# Altium PCB PCB1.PcbDoc
Units mil, origin at the board's own origin, x right, y up, seen from the top; angles counter-clockwise.
Board outline 3238.19 x 3671.26 mil, 2 copper layers (Top Layer, Bottom Layer); 43 components, 31 nets, 181 pads, 0 vias.
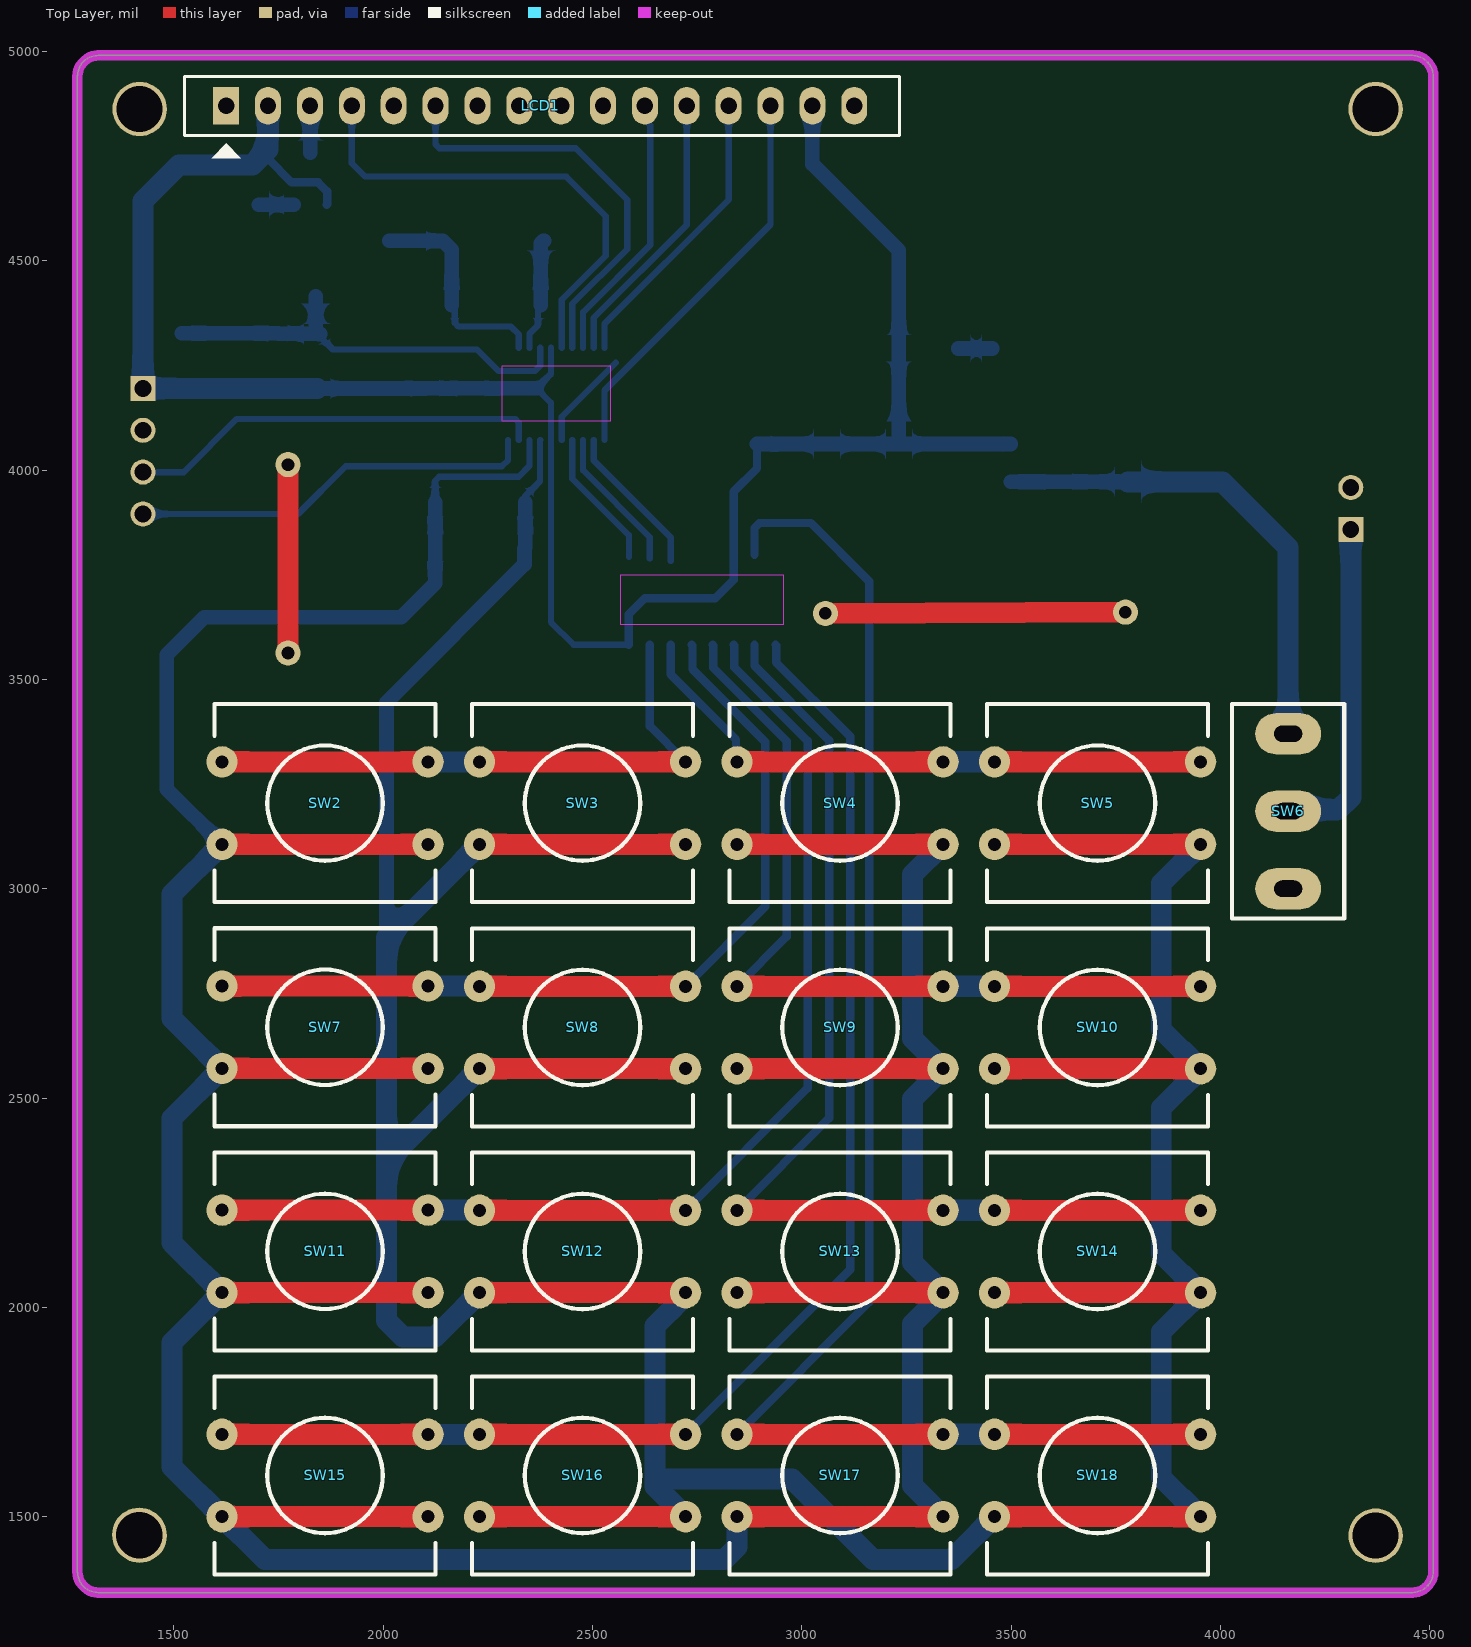
[diagram p0: Top Layer view]
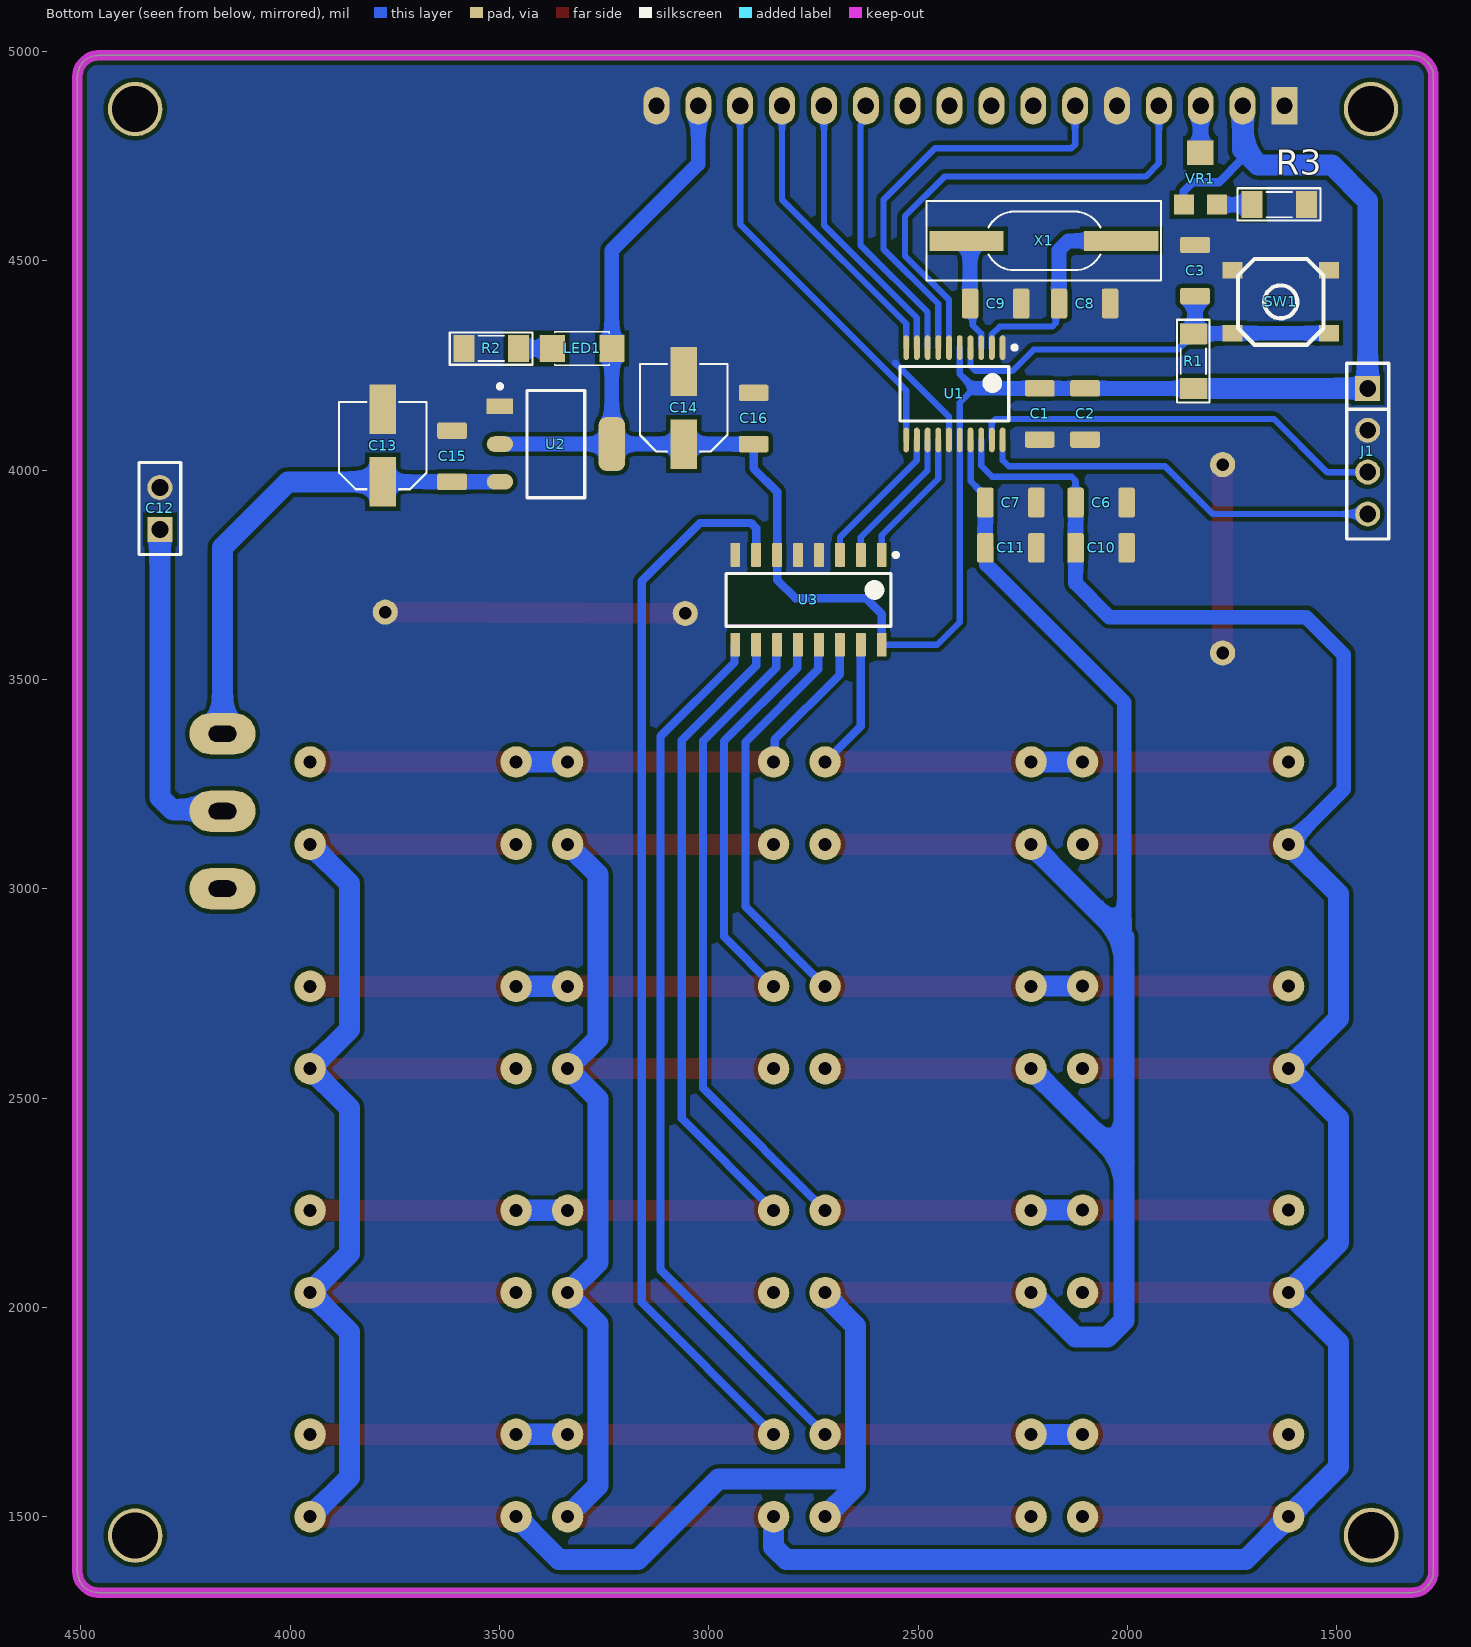
[diagram p1: Bottom Layer view, seen from below]
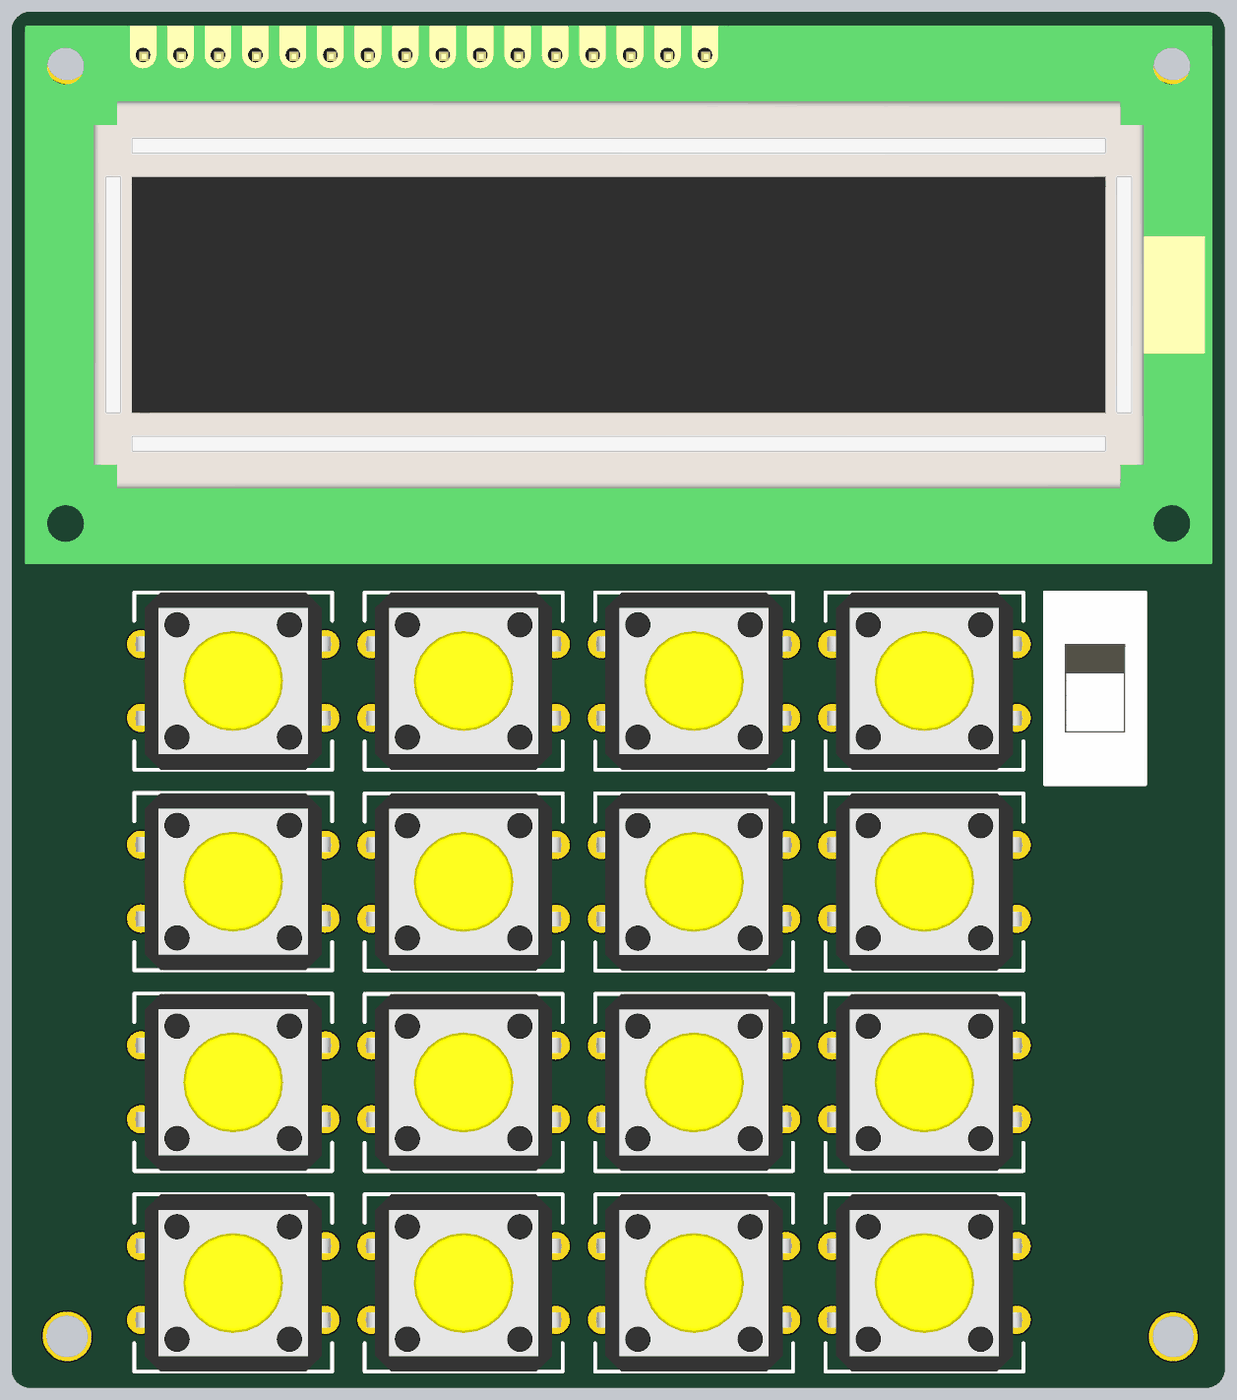
[diagram p2: 3D render of the assembled board from above, using the file's embedded part models]
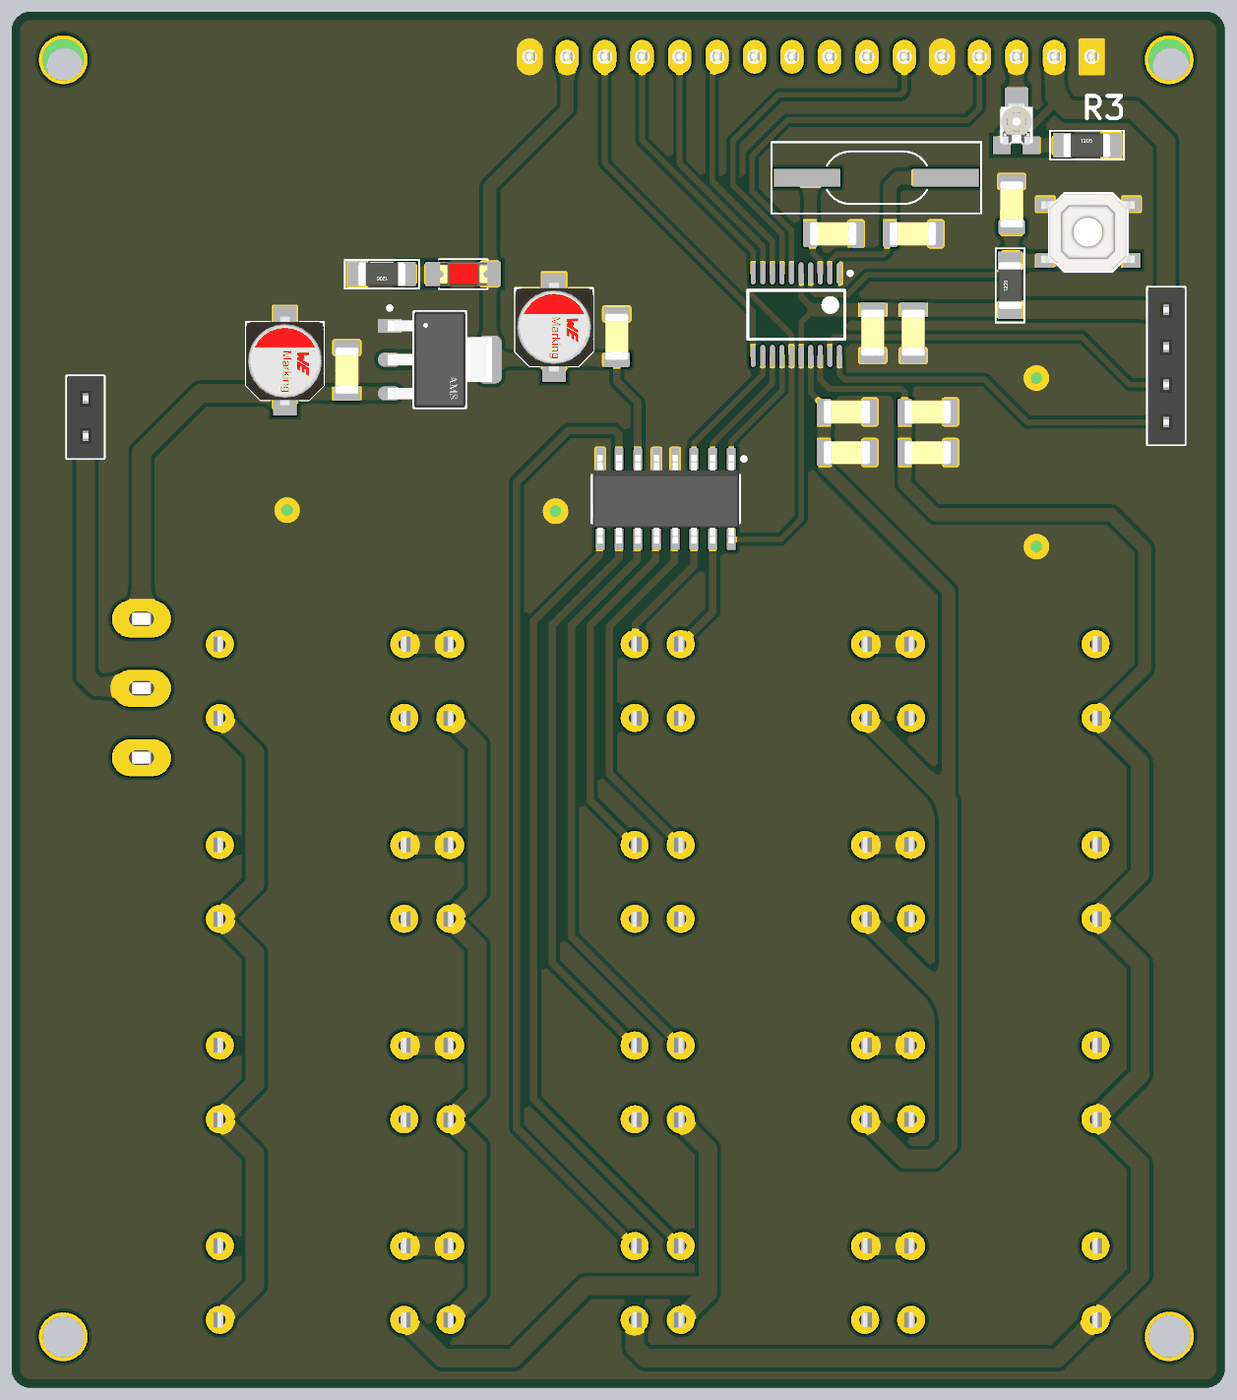
[diagram p3: 3D render of the assembled board from below, using the file's embedded part models]

## Layer stack, top to bottom
Top Solder: solder mask 0.4, Solder Resist, Dk 3.5
Top Layer: signal copper 1.4
Dielectric 1: dielectric 12.6, FR-4, Dk 4.8
Bottom Layer: signal copper 1.4
Bottom Solder: solder mask 0.4, Solder Resist, Dk 3.5

## Board outline
1269.68,1368.9 1269.68,4940.16 cw(c1319.68,4940.16) 1319.68,4990.16 4457.87,4990.16 cw(c4457.87,4940.16) 4507.87,4940.16 4507.87,1368.9 cw(c4457.87,1368.9) 4457.87,1318.9 1319.68,1318.9 cw(c1319.68,1368.9)

## Design rules (kind name [scope] priority, off if disabled: settings)
Clearance [All] p1: gap=10 ignorepadtopadclearanceinfootprint=FALSE
PolygonConnect [All] p1: connectstyle=Direct reliefconductorwidth=10 reliefentries=4 polygonreliefangle="90 Angle" airgapwidth=10
RoutingVias [All] p1: holewidth=28 width=50 viastyle="Through Hole" minholewidth=28 minwidth=50 maxholewidth=28 maxwidth=50
SolderMaskExpansion [All] p1: expansion=4 istentingtop=FALSE
SupplyNets "Schematic Supply Nets_1" [InNet('GND')] p1: voltage=0.000
SupplyNets "Schematic Supply Nets" [InNet('VCC')] p2: voltage=0.000
Width [All] p1: maxlimit=50 minlimit=15 preferedwidth=20 minimp=50.000000 maximp=50.000000 favimp=50.000000
30 further rules are at their usual default settings.

## Components (designator, comment, footprint, x,y, rotation, side; value= is the part's Value field where it differs from the comment)
C1 "100n" CAP_1206 2209.65,4133.86 r90 bottom
C2 "4.7u" CAP_1206 2101.38,4133.86 r90 bottom
C3 "100n" CAP_1206 1838.58,4476.38 r270 bottom
C6 "100n" CAP_1206 2062.99,3922.24 r180 bottom
C7 "100n" CAP_1206 2278.54,3922.24 r180 bottom
C8 "20p" CAP_1206 2102.36,4397.64 r0 bottom
C9 "20p" CAP_1206 2314.96,4397.64 r0 bottom
C10 "1u" CAP_1206 2062.99,3813.98 r180 bottom
C11 "1u" CAP_1206 2278.54,3813.98 r180 bottom
C12 "JP2" JP2-C1T 4311.02,3858.27 r90 bottom
C13 "10u" CAP-ALU-SMD-5x5.5x1.4 3778.54,4058.46 r90 bottom
C14 "10u" CAP-ALU-SMD-5x5.5x1.4 3060.04,4148.62 r90 bottom
C15 "100n" CAP_1206 3613.19,4032.87 r270 bottom
C16 "100n" CAP_1206 2892.72,4123.03 r270 bottom
J1 "Debug_Ext" JP4-C1T 1426.18,4194.88 r270 bottom
LCD1 "LCD 16x2A" LCD16X2N 1625,4870 r0 top locked value=LCD16x2A
LED1 "LED" LED-1206-Red 3231.5,4290.35 r0 bottom value="LED 3 - 5 ly 2 Colour"
R1 "10k" RES-SMD-1206 1842.52,4259.84 r90 bottom
R2 "510" RES-SMD-1206 3519.68,4290.36 r0 bottom
R3 "220" RES-SMD-1206 1637.8,4633.86 r180 bottom
SW1 "SW" SW2-SMD-2.5mm 1633.86,4401.57 r180 bottom value="SW chip 2 pin"
SW2 "SW" SW1-DIP-12x12x8-Yellow 1861.06,3204.44 r0 top value="SW chip 2 pin"
SW3 "SW" SW1-DIP-12x12x8-Yellow 2476.06,3204.44 r0 top value="SW chip 2 pin"
SW4 "SW" SW1-DIP-12x12x8-Yellow 3091.06,3204.44 r0 top value="SW chip 2 pin"
SW5 "SW" SW1-DIP-12x12x8-Yellow 3706.06,3204.44 r0 top value="SW chip 2 pin"
SW6 "Switch 3x1" SS12D10 4161.42,3185.04 r270 top value="Switch 4x2"
SW7 "SW" SW1-DIP-12x12x8-Yellow 1861.06,2669.13 r0 top value="SW chip 2 pin"
SW8 "SW" SW1-DIP-12x12x8-Yellow 2476.06,2668.5 r0 top value="SW chip 2 pin"
SW9 "SW" SW1-DIP-12x12x8-Yellow 3091.06,2668.5 r0 top value="SW chip 2 pin"
SW10 "SW" SW1-DIP-12x12x8-Yellow 3706.06,2668.5 r0 top value="SW chip 2 pin"
SW11 "SW" SW1-DIP-12x12x8-Yellow 1861.06,2133.82 r0 top value="SW chip 2 pin"
SW12 "SW" SW1-DIP-12x12x8-Yellow 2476.06,2133.5 r0 top value="SW chip 2 pin"
SW13 "SW" SW1-DIP-12x12x8-Yellow 3091.06,2133.5 r0 top value="SW chip 2 pin"
SW14 "SW" SW1-DIP-12x12x8-Yellow 3706.06,2133.5 r0 top value="SW chip 2 pin"
SW15 "SW" SW1-DIP-12x12x8-Yellow 1861.06,1598.5 r0 top value="SW chip 2 pin"
SW16 "SW" SW1-DIP-12x12x8-Yellow 2476.06,1598.5 r0 top value="SW chip 2 pin"
SW17 "SW" SW1-DIP-12x12x8-Yellow 3091.06,1598.5 r0 top value="SW chip 2 pin"
SW18 "SW" SW1-DIP-12x12x8-Yellow 3706.06,1598.5 r0 top value="SW chip 2 pin"
U1 "STM32F030F4P6" STM-TSSOP20_L 2413.39,4182.09 r270 bottom
U2 "AMS1117-3.3" FP-AMS1117-IPC_A 3365.16,4062.01 r180 bottom
U3 "SN74HC138D" D0016A_N 2761.81,3689.96 r270 bottom
VR1 "" "VR 3x3" 1825.79,4696.85 r180 bottom value="Volume 50k"
X1 "8Mhz" XT2-SMD 2204.72,4547.24 r0 bottom value=4Mhz

## Footprints (in the part's own frame and the unit in brackets; to place one, negate y for a bottom-side part, rotate by r counter-clockwise, add the part's x,y. Pads: shape width x height; smd on the part's side, far side on the other; paste and mask are expansions set on the pad)
CAP-ALU-SMD-5x5.5x1.4 [mm]
  rect 3x1.6 smd: 1(-2.2,0) 2(2.2,0)
  silkscreen extent -2.65,-2.65 2.65,2.65, body extent -3,-2.65 3,2.65, height 5.45
CAP_1206 [mm]
  rrect25% 1x1.8 smd: 1(-1.55,0) 2(1.55,0)
  body extent -1.6,-0.8 1.6,0.8, height 0.94
D0016A_N [mm] "SOIC, 16-Leads, Body 10x4mm, Pitch 1.27mm, IPC Medium Density"
  rrect17% 1.45x0.6 smd: 1(-2.725,4.445) 2(-2.725,3.175) 3(-2.725,1.905) 4(-2.725,0.635) 5(-2.725,-0.635) 6(-2.725,-1.905) 7(-2.725,-3.175) 8(-2.725,-4.445) 9(2.725,-4.445) 10(2.725,-3.175) 11(2.725,-1.905) 12(2.725,-0.635) 13(2.725,0.635) 14(2.725,1.905) 15(2.725,3.175) 16(2.725,4.445)
  silkscreen extent -2.85,-5 1.6,5.42, body extent -3,-4.95 3,4.95, height 1.59
FP-AMS1117-IPC_A [mm]
  rect 1.604x0.952 smd paste+0 mask+0: 1(-3.395,2.29)
  rrect100% 1.604x0.952 smd paste+0 mask+0: 2(-3.395,0) 3(-3.395,-2.29)
  rrect59% 1.604x3.262 smd paste+0 mask+0: 4(3.395,0)
  silkscreen extent -3.52,-3.25 1.75,3.62, body extent -3.53,-3.25 3.53,3.25, height 1.8
JP2-C1T [mm] "2 row, straight, gold plating"
  rect 1.52x1.52 hole 1.02: 1(0,0)
  round 1.52 hole 1.02: 2(2.54,0)
  silkscreen extent -1.52,-1.27 4.06,1.27, body extent -1.52,-1.25 4.06,1.25, height 8.51
JP4-C1T [mm] "4 row, straight, gold plating"
  rect 1.52x1.52 hole 1.02: 1(0,0)
  round 1.52 hole 1.02: 2(2.54,0) 3(5.08,0) 4(7.62,0)
  silkscreen extent -1.52,-1.27 9.14,1.27, body extent -1.52,-1.25 9.14,1.25, height 8.51
LCD16X2N [mil] "LCD dipslay 16x2, 16 pin"
  rect 62x90 hole 39: 1(0,0)
  oval 62x90 hole 39: 2(100,0) 3(200,0) 4(300,0) 5(400,0) 6(500,0) 7(600,0) 8(700,0) 9(800,0) 10(900,0) 11(1000,0) 12(1100,0) 13(1200,0) 14(1300,0) 15(1400,0) 16(1500,0)
  silkscreen extent -100,-125 1608,70, body extent -320,-1353 2850,84, height 764
LED-1206-Red [mil]
  rect 60x65 smd: 1(0,0) 2(142,0)
  silkscreen extent 6,-40 136,40, body extent 7,-31 133,31, height 43
RES-SMD-1206 [mil]
  rect 50x65 smd: 1(-65,0) 2(65,0)
  silkscreen extent -99,-38 99,39, body extent -63,-31 63,32, height 40
SS12D10 [mm]
  oval 2.5x4 hole 1 slot 1.7 at 90 deg: 1(-4.7,0) 2(0,0) 3(4.7,0)
  silkscreen extent -6.5,-3.4 6.5,3.4, body extent -6.5,-3.4 6.5,3.4, height 10.76
STM-TSSOP20_L [mm] "SOP, 20-Leads, Body 6.6x4.5mm, Pitch 0.65mm, IPC High Density"
  oval 1.5x0.35 smd: 1(-2.8,2.925) 2(-2.8,2.275) 3(-2.8,1.625) 4(-2.8,0.975) 5(-2.8,0.325) 6(-2.8,-0.325) 7(-2.8,-0.975) 8(-2.8,-1.625) 9(-2.8,-2.275) 10(-2.8,-2.925) 11(2.8,-2.925) 12(2.8,-2.275) 13(2.8,-1.625) 14(2.8,-0.975) 15(2.8,-0.325) 16(2.8,0.325) 17(2.8,0.975) 18(2.8,1.625) 19(2.8,2.275) 20(2.8,2.925)
  silkscreen extent -2.92,-3.3 1.65,3.77, body extent -2.25,-3.3 2.25,3.3, height 1.2
SW1-DIP-12x12x8-Yellow [mm] "SW button 4pin, 12x12mm"
  round 1.905 hole 0.787: 1(-6.25,2.5) 1(6.25,2.5) 2(-6.25,-2.5) 2(6.25,-2.5)
  silkscreen extent -6.71,-6.01 6.71,6.01, body extent -6.71,-6.01 6.71,6.01, height 7.87
SW2-SMD-2.5mm [mm] "SMD 5.2x5.2mm tactile switch push-button"
  rect 1.2x1 smd: 1(-2.921,1.905) 1(2.921,1.905) 2(-2.921,-1.905) 2(2.921,-1.905)
  silkscreen extent -2.6,-2.6 2.6,2.6, body extent -3.23,-2.58 3.17,2.62, height 2.5
"VR 3x3" [mm]
  rect 1.2x1.2 smd mask+0.051: 1(-1,-1.6) 3(1,-1.6)
  rect 1.6x1.5 smd mask+0.051: 2(0,1.55)
  body extent -1.1,-1.56 1.1,1.25, height 0.81
XT2-SMD [mm]
  rect 4.5x1.2 smd: 1(-4.826,0) 2(4.572,0)
  silkscreen extent -7.24,-2.41 6.99,2.41, body extent -6.53,-2.41 6.27,2.42, height 4.3

## Part data
C1 C2 C3 C6 C7 C8 C9 C10 C11 C15 C16: library part CAP_1206, "Capacitor SMD 1206"
C12: "WR-PHD 2.54 mm Angled Socket Header", Manufacturer="W¨¹rth Elektronik eiSos GmbH", partNo=613002143121, ComponentLink1 Description=Manufacturer, ComponentLink1URL=http://www.we-online.com, ComponentLink2 Description=Datasheet, ComponentLink2URL=http://katalog.we-online.de/em/datasheet/6130xx143121.pdf, Created by="Karrer Zheng", Created Date="29 March 2013", NoPins=02
C13 C14: library part pol_cap
J1: library part Jumper4
LCD1: library part LCD16x2A, "LCD dipslay 16 char, 2 line"
LED1: library part "LED SMD"
R1 R2 R3: library part Res-SMD, "Resistor", Manufacturer="Generic Components", Class=Passive, Published=08/06/2000, Publisher="Altium Hobart Technology Centre"
SW1 SW2 SW3 SW4 SW5 SW7 SW8 SW9 SW10 SW11 SW12 SW13 SW14 SW15 SW16 SW17 SW18: library part SW2, "Switch button 2 pin"
SW6: library part SW3x1
U1: library part CMP-0304-00039-2, "ARM Cortex-M0 32-bit MCU, 16 KB Flash, 4 KB Internal RAM, 15 I/Os, 20-pin TSSOP, -40 to 85 degC, Tube", I/Os (High Current)=15, Operating Frequency(F) (Processor speed) (MHz)=48, Supply Voltage(Vcc) min (V)=2.4, ComponentLink1Description="Manufacturer URL", ComponentLink1URL=http://www.st.com/web/en/home.html, ComponentLink2Description=Datasheet, ComponentLink2URL=http://www.st.com/st-web-ui/static/active/en/resource/technical/document/datasheet/DM00088500.pdf, ComponentLink3Description="Package Specification", ComponentLink3URL=http://www.st.com/st-web-ui/static/active/en/resource/technical/document/datasheet/DM00065136.pdf, Core="ARM Cortex-M0", DatasheetVersion="Rev. 1", FLASH Size (Prog) (kB)=16, Internal RAM Size (kB)=4, Mounting Technology="Surface Mount", PackageDescription="20-Pin Thin Shrink Small Outline Package, 6.5 x 4.4 mm Body, 0.65 mm Pitch", PackageReference=TSSOP20, PackageVersion="Rev. 1, 11/2012", Packing=Tube, PartNumber=STM32F030F4P6
U2: library part CMP-209535-000001-1, "LDO Voltage Regulators 1A, 3.3V", Dropout Voltage=1.1V, Manufacturer="Advanced Monolithic Systems", Max Junction Temp=+125°C, Max Power Dissipation=1.2W, Max Supply Voltage=15V, Nominal Supply Current=5mA, Output Current=1A, Output Voltage=3.3V, Package=AMS1117, Temperature="-40°C to +125°C", Temperature Range Low=-40°C, Automotive=No, Category=IC, ComponentLink2Description=Datasheet, ComponentLink2URL=http://www.advanced-monolithic.com/pdf/ds1117.pdf, Device Class L1="Integrated Circuits (ICs)", Device Class L2="Power Management ICs", Device Class L3="Voltage Regulators - Linear", Height=1.8mm, Ipc Land Pattern Name=SOT229P700X180-4, Lead Free=Yes, Manufacturer Part Number=AMS1117-3.3, Number Of Outputs=1, Octopart=https://octopart.com/ams1117-3.3-advanced+monolithic+systems-25899300, Output Type=Fixed, RoHS=TRUE, Standoff Height=0.64mm, Temperature Range High=+125°C
U3: library part CMP-1633-00243-2, "3-Line To 8-Line Decoders/Demultiplexers, D0016A, TUBE", F @ Nom Voltage(Max)(Mhz)=28, Generic Part Number=SN74HC138, ICC @ Nom Voltage(Max)(mA)=0.08, Manufacturer="Texas Instruments", Operating Temperature Range(C)="-40 to 85", Rating=Catalog, tpd @ Nom Voltage(Max)(ns)=45, Voltage(Nom)(V)=3.3,5, Bits(#)=8, Channels(#)=1, Code_JEDEC="MS-012 variation AC", Configuration=3：8, DatasheetVersion=SCLS107E, Function=Decoder/Demultiplexer, Input Type=LVTTL/CMOS, Output Drive (IOL/IOH)(Max)(mA)=5.2/-5.2, Output Type=CMOS, PackageReference=D0016A, Schmitt Trigger=No, Technology Family=HC, Type=Standard, VCC(Max)(V)=6, VCC(Min)(V)=2
VR1: library part VR-S, "Var Resistor"
X1: library part XT2, "Crystal, 32.768 KHz, -40 to 85 degC, 3.2 x 1.5 x 0.9 mm SMD"

## Free pads (board coordinates)
  round 130 hole 110: 4(1417.32,1456.69) 4(1418.32,1454.98) 5(4370.08,1454.98) 6(1418.32,4862.2) 7(4370.08,4862.2)
  round 60 hole 30: 8(1772.64,4012.8) 9(1772.64,3562.99) 10(3056.1,3657.48) 11(3772.64,3660.43)

## Nets (pads, with @x,y where several pads share a name; then routed paths per layer and width w, separated by ;. In a path a pad name is that pad's centre, name@x,y a point inside that pad or via, vN(x,y) a via of type N, cw(c..) or ccw(c..) an arc to the next point about the centre after c; other vN are vias at no path point)
GND: C1.1 C2.1 C3.1 C6.2 C7.2 C8.1 C9.1 C10.2 C11.2 C12.2 C13.2 C14.2 C15.1 C16.1 J1.2 LCD1.1 LCD1.5 LCD1.16 pad.8 pad.9 pad.10 pad.11 R2.2 R3.2 SW1.1 U1.1 U1.15 U2.1 U3.4 U3.5 U3.8 | length 1403.8
  Top Layer w50: pad.9 pad.8 ; pad.10 pad.11
  Bottom Layer w15: U1.15 2426.18,4126.97 2555.12,4255.91
KP_C1: C6.1 C10.1 SW2.2 SW4.2 SW7.2 SW9.2 SW11.2 SW13.2 SW15.2 SW17.2 U1.18 | length 10748
  Top Layer w50: SW15.2@1614.99,1500.08 SW15.2@2107.12,1500.08 ; SW11.2@1614.99,2035.39 SW11.2@2107.12,2035.39 ; SW7.2@1614.99,2570.71 SW7.2@2107.12,2570.71 ; SW2.2@1614.99,3106.02 SW2.2@2107.12,3106.02 ; SW17.2@2844.99,1500.08 SW17.2@3337.12,1500.08 ; SW13.2@2844.99,2035.08 SW13.2@3337.12,2035.08 ; SW9.2@2844.99,2570.08 SW9.2@3337.12,2570.08 ; SW4.2@2844.99,3106.02 SW4.2@3337.12,3106.02
  Bottom Layer w15: C6.1 2124.02,3974.48 2133.39,3983.86 2323.43,3983.86 2349.41,4009.84 U1.18
  Bottom Layer w35: SW2.2@1614.99,3106.02 1483.27,3237.74 1483.27,3559.06 1572.83,3648.62 2043.31,3648.62 2124.02,3729.33 C10.1 C6.1
  Bottom Layer w50: SW2.2@1614.99,3106.02 1496.06,2987.09 1496.06,2689.64 1614.99,2570.71 1496.06,2451.78 1496.06,2154.32 1614.99,2035.39 1496.06,1916.46 1496.06,1619.01 1614.99,1500.08 1717.43,1397.64 2814.96,1397.64 2844.99,1427.67 SW17.2@2844.99,1500.08 ; SW17.2@3337.12,1500.08 3337.12,1501.99 3264.62,1574.49 3264.62,1960.66 3337.12,2033.16 3337.12,2035.08 3264.62,2107.58 3264.62,2497.58 3337.12,2570.08 3264.62,2642.58 3264.62,3033.52 SW4.2@3337.12,3106.02
KP_C2: C7.1 C11.1 SW3.2 SW5.2 SW8.2 SW10.2 SW12.2 SW14.2 SW16.2 SW18.2 U1.17 | length 10477.7
  Top Layer w50: SW16.2@2229.99,1500.08 SW16.2@2722.12,1500.08 ; SW12.2@2229.99,2035.08 SW12.2@2722.12,2035.08 ; SW8.2@2229.99,2570.08 SW8.2@2722.12,2570.08 ; SW3.2@2229.99,3106.02 SW3.2@2722.12,3106.02 ; SW18.2@3459.99,1500.08 SW18.2@3952.12,1500.08 ; SW14.2@3459.99,2035.08 SW14.2@3952.12,2035.08 ; SW10.2@3459.99,2570.08 SW10.2@3952.12,2570.08 ; SW5.2@3459.99,3106.02 SW5.2@3952.12,3106.02
  Bottom Layer w15: C7.1 2339.57,3937.99 2374.41,3972.83 2374.41,4071.26 U1.17
  Bottom Layer w35: 2007.87,2883.9 2007.87,3444.88 2337.38,3774.39 C11.1@2337.38,3811.79 ; SW3.2@2222.34,3113.67 SW3.2@2229.99,3106.02 ; C11.1 C7.1
  Bottom Layer w50: SW12.2@2229.99,2035.08 2124.05,1929.13 2047.24,1929.13 2007.87,1968.5 2007.87,2347.96 ; SW8.2@2229.99,2570.08 2007.87,2347.96 ; SW3.2@2229.99,3106.02 2007.87,2883.9 2007.87,2347.96 ; 2649.62,1590.55 2976.38,1590.55 3169.29,1397.64 3357.55,1397.64 SW18.2@3459.99,1500.08 ; SW16.2@2722.12,1500.08 2649.62,1572.58 2649.62,1955.81 2722.12,2028.31 SW12.2@2722.12,2035.08 ; SW18.2@3952.12,1500.08 3858.27,1593.93 3858.27,1941.23 3952.12,2035.08 3858.27,2128.93 3858.27,2476.23 3952.12,2570.08 3858.27,2663.93 3858.27,3012.17 SW5.2@3952.12,3106.02
KP_R0: U1.14 U3.1 | length 335.4
  Bottom Layer w15: U1.14 2451.77,3979.33 2586.81,3844.29 U3.1@2586.81,3792.42
KP_R1: U1.13 U3.2 | length 349.3
  Bottom Layer w15: U1.13 2477.36,3999.02 2636.81,3839.57 U3.2@2636.81,3788.62
KP_R2: U1.12 U3.3 | length 365.4
  Bottom Layer w15: U1.12 2502.95,4022.64 2686.81,3838.78 U3.3@2686.81,3782.64
LCD_D4: LCD1.11 U1.8 | length 649.4
  Bottom Layer w15: U1.8 2477.36,4376.97 2637.8,4537.4 2637.8,4823.71 2633.99,4827.52 2633.99,4861.01 LCD1.11
LCD_D5: LCD1.12 U1.9 | length 669.7
  Bottom Layer w15: U1.9 2502.95,4363.19 2725,4585.24 LCD1.12
LCD_D6: LCD1.13 U1.10 | length 700.5
  Bottom Layer w15: U1.10 2528.54,4349.41 2825,4645.87 LCD1.13
LCD_D7: LCD1.14 U1.11 | length 962.4
  Bottom Layer w15: U1.11 2528.54,4189.96 2925,4586.42 LCD1.14
LCD_E: LCD1.6 U1.7 | length 1012.4
  Bottom Layer w15: LCD1.6 2125,4777.49 2133.79,4768.7 2459.65,4768.7 2582.68,4645.67 2582.68,4527.56 2451.77,4396.65 U1.7
LCD_RS: LCD1.4 U1.6 | length 1153.9
  Bottom Layer w15: LCD1.4 1925,4732.48 1956.69,4700.79 2437.01,4700.79 2531.5,4606.3 2531.5,4511.81 2426.18,4406.5 U1.6
LCD_V0: LCD1.3 VR1.2 | length 112.5
  Bottom Layer w35: LCD1.3 1825.39,4869.61 1825.39,4758.27 VR1.2
NetC12_1: C12.1 SW6.2 | length 801.7
  Bottom Layer w50: SW6.2@4161.42,3188.98 4281.73,3188.98 4311.02,3218.27 C12.1
NetC13_1: C13.1 C15.2 SW6.1 U2.3 | length 1172.5
  Bottom Layer w35: U2.3 C15.2 C13.1
  Bottom Layer w50: C13.1 4004.53,3971.85 4161.42,3814.96 SW6.1
NetLED1_2: LED1.2 R2.1 | length 81.2
  Bottom Layer w35: LED1.2 R2.1
NetR3_1: R3.1 VR1.3 | length 83.6
  Bottom Layer w35: R3.1 VR1.3
NetSW2_1: SW2.1 SW3.1 U3.15 | length 1422.3
  Top Layer w50: SW2.1@1614.99,3302.87 SW2.1@2107.12,3302.87 ; SW3.1@2229.99,3302.87 SW3.1@2722.12,3302.87
  Bottom Layer w20: U3.15 2636.81,3388.18 SW3.1@2722.12,3302.87
  Bottom Layer w50: SW2.1@2107.12,3302.87 SW3.1@2229.99,3302.87
NetSW4_1: SW4.1 SW5.1 U3.14 | length 1452.5
  Top Layer w50: SW4.1@2844.99,3302.87 SW4.1@3337.12,3302.87 ; SW5.1@3459.99,3302.87 SW5.1@3952.12,3302.87
  Bottom Layer w20: U3.14 2686.81,3512.01 2842.74,3356.08 2842.74,3305.12 SW4.1@2844.99,3302.87
  Bottom Layer w50: SW4.1@3337.12,3302.87 SW5.1@3459.99,3302.87
NetSW7_1: SW7.1 SW8.1 U3.13 | length 2075.1
  Top Layer w50: SW7.1@1614.99,2767.56 SW7.1@2107.12,2767.56 ; SW8.1@2229.99,2766.93 SW8.1@2722.12,2766.93
  Bottom Layer w20: SW8.1@2722.12,2766.93 2912.4,2957.21 2912.4,3350.39 2738.62,3524.17 2738.62,3580.87 U3.13
  Bottom Layer w50: SW7.1@2107.12,2767.56 2229.99,2767.56 SW8.1@2229.99,2766.93
NetSW9_1: SW9.1 SW10.1 U3.12 | length 2045.2
  Top Layer w50: SW9.1@2844.99,2766.93 SW9.1@3337.12,2766.93 ; SW10.1@3459.99,2766.93 SW10.1@3952.12,2766.93
  Bottom Layer w20: U3.12 2788.62,3580.87 2788.62,3527.32 2963.58,3352.36 2963.58,2885.52 SW9.1@2844.99,2766.93
  Bottom Layer w50: SW9.1@3337.12,2766.93 SW10.1@3459.99,2766.93
NetSW11_1: SW11.1 SW12.1 U3.11 | length 2652.3
  Top Layer w50: SW11.1@1614.99,2232.24 SW11.1@2107.12,2232.24 ; SW12.1@2229.99,2231.93 SW12.1@2722.12,2231.93
  Bottom Layer w20: SW12.1@2722.12,2231.93 3013.78,2523.59 3013.78,3353.13 2838.62,3528.29 2838.62,3580.87 U3.11
  Bottom Layer w50: SW11.1@2107.12,2232.24 2229.99,2232.24 SW12.1@2229.99,2231.93
NetSW13_1: SW13.1 SW14.1 U3.10 | length 2622.8
  Top Layer w50: SW13.1@2844.99,2231.93 SW13.1@3337.12,2231.93 ; SW14.1@3459.99,2231.93 SW14.1@3952.12,2231.93
  Bottom Layer w20: SW13.1@2844.99,2231.93 3064.96,2451.9 3064.96,3354.33 2886.81,3532.48 U3.10
  Bottom Layer w50: SW13.1@3337.12,2231.93 SW14.1@3459.99,2231.93
NetSW15_1: SW15.1 SW16.1 U3.9 | length 3229.5
  Top Layer w50: SW15.1@1614.99,1696.93 SW15.1@2107.12,1696.93 ; SW16.1@2229.99,1696.93 SW16.1@2722.12,1696.93
  Bottom Layer w20: SW16.1@2722.12,1696.93 3115.16,2089.97 3115.16,3364.17 2938.62,3540.71 2938.62,3580.87 U3.9
  Bottom Layer w50: SW15.1@2107.12,1696.93 SW16.1@2229.99,1696.93
NetSW17_1: SW17.1 SW18.1 U3.7 | length 3675.5
  Top Layer w50: SW17.1@2844.99,1696.93 SW17.1@3337.12,1696.93 ; SW18.1@3459.99,1696.93 SW18.1@3952.12,1696.93
  Bottom Layer w20: SW17.1@2844.99,1696.93 3160.43,2012.37 3160.43,3734.25 3021.39,3873.29 2898.53,3873.29 2886.81,3861.57 U3.7
  Bottom Layer w50: SW17.1@3337.12,1696.93 SW18.1@3459.99,1696.93
NRST: C3.2 R1.2 SW1.2 U1.4 | length 1038.5
  Bottom Layer w15: R1.2 1879.75,4287.62 2224.19,4287.62 2275.59,4236.22 2362.2,4236.22 2375,4249.02 U1.4
  Bottom Layer w35: SW1.2@1518.86,4326.57 1748.86,4326.57 1749.73,4325.71 R1.2@1841.66,4325.71 ; C3.2 1838.58,4332.34 1846.08,4324.84 R1.2@1850.02,4324.84
OSCIN: C8.2 U1.2 X1.1 | length 530.7
  Bottom Layer w15: C8.2@2163.39,4393.7 2171.11,4385.98 2171.11,4351.31 2179.9,4342.52 2305.16,4342.52 2323.82,4323.86 U1.2
  Bottom Layer w35: X1.1 2141.73,4547.24 2163.39,4525.59 C8.2@2163.39,4393.7
OSCOUT: C9.2 U1.3 X1.2 | length 271.1
  Bottom Layer w15: U1.3 2349.41,4325.79 2369.63,4346 2369.63,4387.34 C9.2@2375.98,4393.7
  Bottom Layer w35: C9.2@2375.98,4393.7 2375.98,4541.12 2382.11,4547.24 X1.2
SWCLK: J1.4 U1.20 | length 973.6
  Bottom Layer w15: J1.4 1796.46,3894.88 1910.43,4008.86 2283.46,4008.86 2298.23,4023.62 U1.20
SWDIO: J1.3 U1.19 | length 995.4
  Bottom Layer w15: J1.3 1523.43,3994.88 1650.59,4122.05 2315.03,4122.05 2323.82,4113.26 U1.19
VCC: C1.2 C2.2 C14.1 C16.2 J1.1 LCD1.2 LCD1.15 LED1.1 R1.1 U1.5 U1.16 U2.2 U2.4 U3.6 U3.16 VR1.1 | length 5166.3
  Bottom Layer w15: U1.5 2400.59,4229.33 2366.14,4194.88 2400.59,4160.43 U1.16 2400.59,3636.81 2454.72,3582.68 U3.16
  Bottom Layer w20: 1725,4765.35 1725,4743.5 1781.45,4687.06 1844.54,4687.06 1866.14,4665.45 1866.14,4634.84 VR1.1 ; U3.16 2586.81,3655.71 2625,3693.9 2793.31,3693.9 2836.81,3737.4 U3.6 2836.81,3948.03 2892.72,4003.94 C16.2
  Bottom Layer w35: R1.1 C2.2@2101.34,4194.84 ; C2.2 C1.2 2366.14,4194.88 ; C16.2 C14.1 U2.4 ; LCD1.15 3025,4730.91 3231.5,4524.41 LED1.1 U2.4 ; U2.2 U2.4
  Bottom Layer w50: LCD1.2 1725,4765.35 1687.99,4728.35 1511.81,4728.35 1426.18,4642.72 J1.1 R1.1@1842.52,4194.88
pads on no net: LCD1.7 LCD1.8 LCD1.9 LCD1.10 SW6.3

## Polygon pours and split planes (outlines as drawn)
GND on Bottom Layer "GND_L02_P000" (solid, remove dead copper, pour order 0): 1269.68,1368.9 1269.68,4940.16 cw(c1319.68,4940.16) 1319.68,4990.16 4457.87,4990.16 cw(c4457.87,4940.16) 4507.87,4940.16 4507.87,1368.9 cw(c4457.87,1368.9) 4457.87,1318.9 1319.68,1318.9 cw(c1319.68,1368.9)

## Keep-outs
Keep-Out Layer:
  region: 2567.91,3750 2955.71,3750 2955.71,3629.92 2567.91,3629.92 2567.91,3749.02
  pour cut-out: 2283.46,4248.03 2283.46,4118.11 2543.31,4118.11 2543.31,4248.03
  lines w25: 1269.68,1368.9 ccw(c1319.68,1368.9) 1319.68,1318.9 4457.87,1318.9 ccw(c4457.87,1368.9) 4507.87,1368.9 4507.87,4940.16 ccw(c4457.87,4940.16) 4457.87,4990.16 1319.68,4990.16 ccw(c1319.68,4940.16) 1269.68,4940.16 1269.68,1368.9